# Altium PCB PCB1.PcbDoc
Units mm, origin at the board's own origin, x right, y up, seen from the top; angles counter-clockwise.
Board outline 49.3 x 38.92 mm, 2 copper layers (Top Layer, Bottom Layer); 26 components, 14 nets, 101 pads, 24 vias.
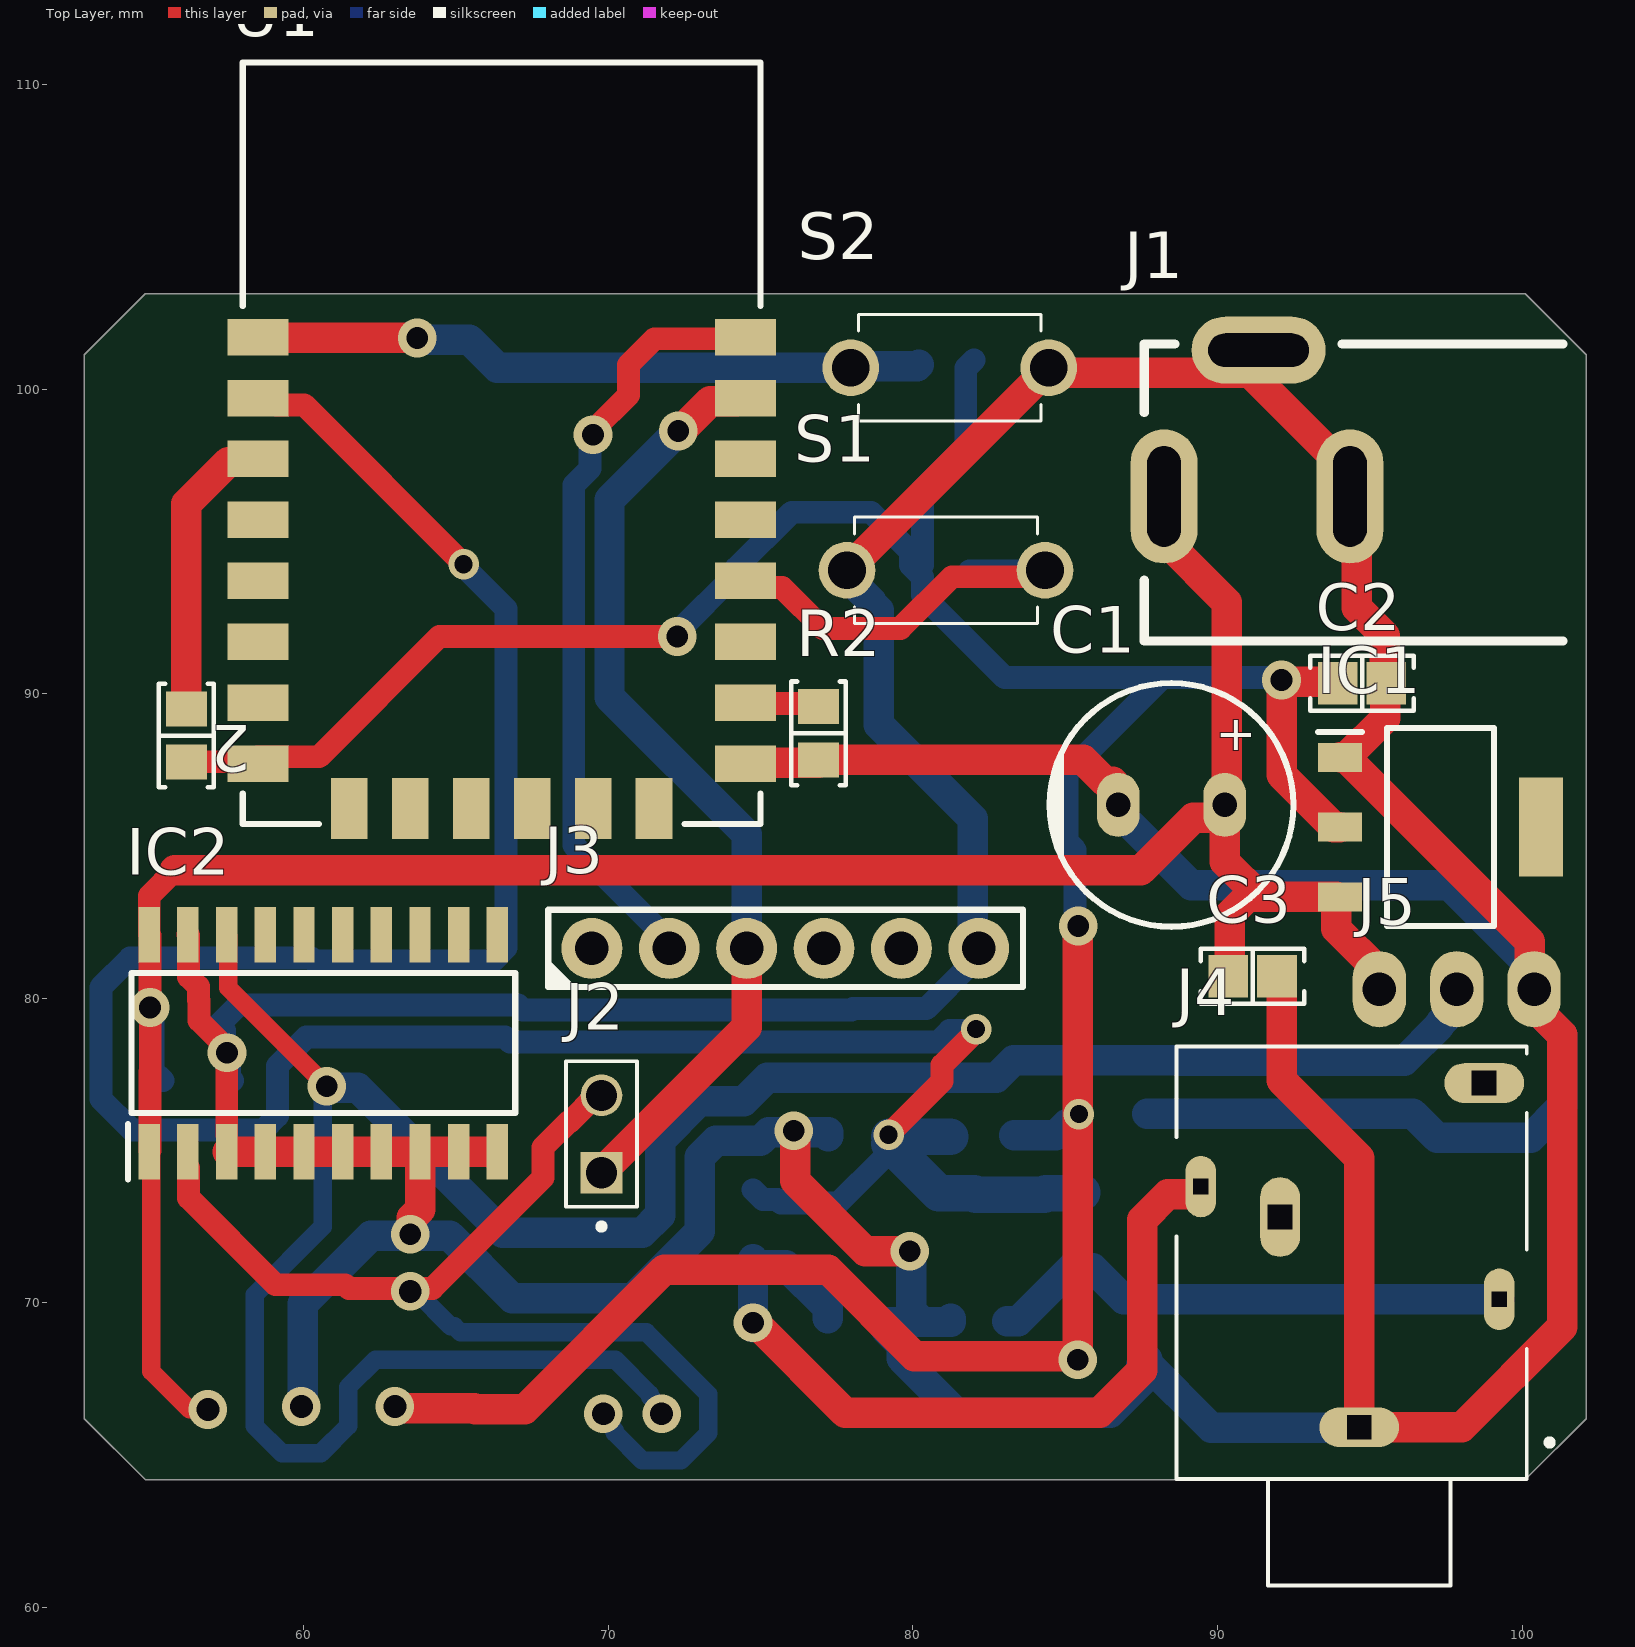
[diagram p0: Top Layer view]
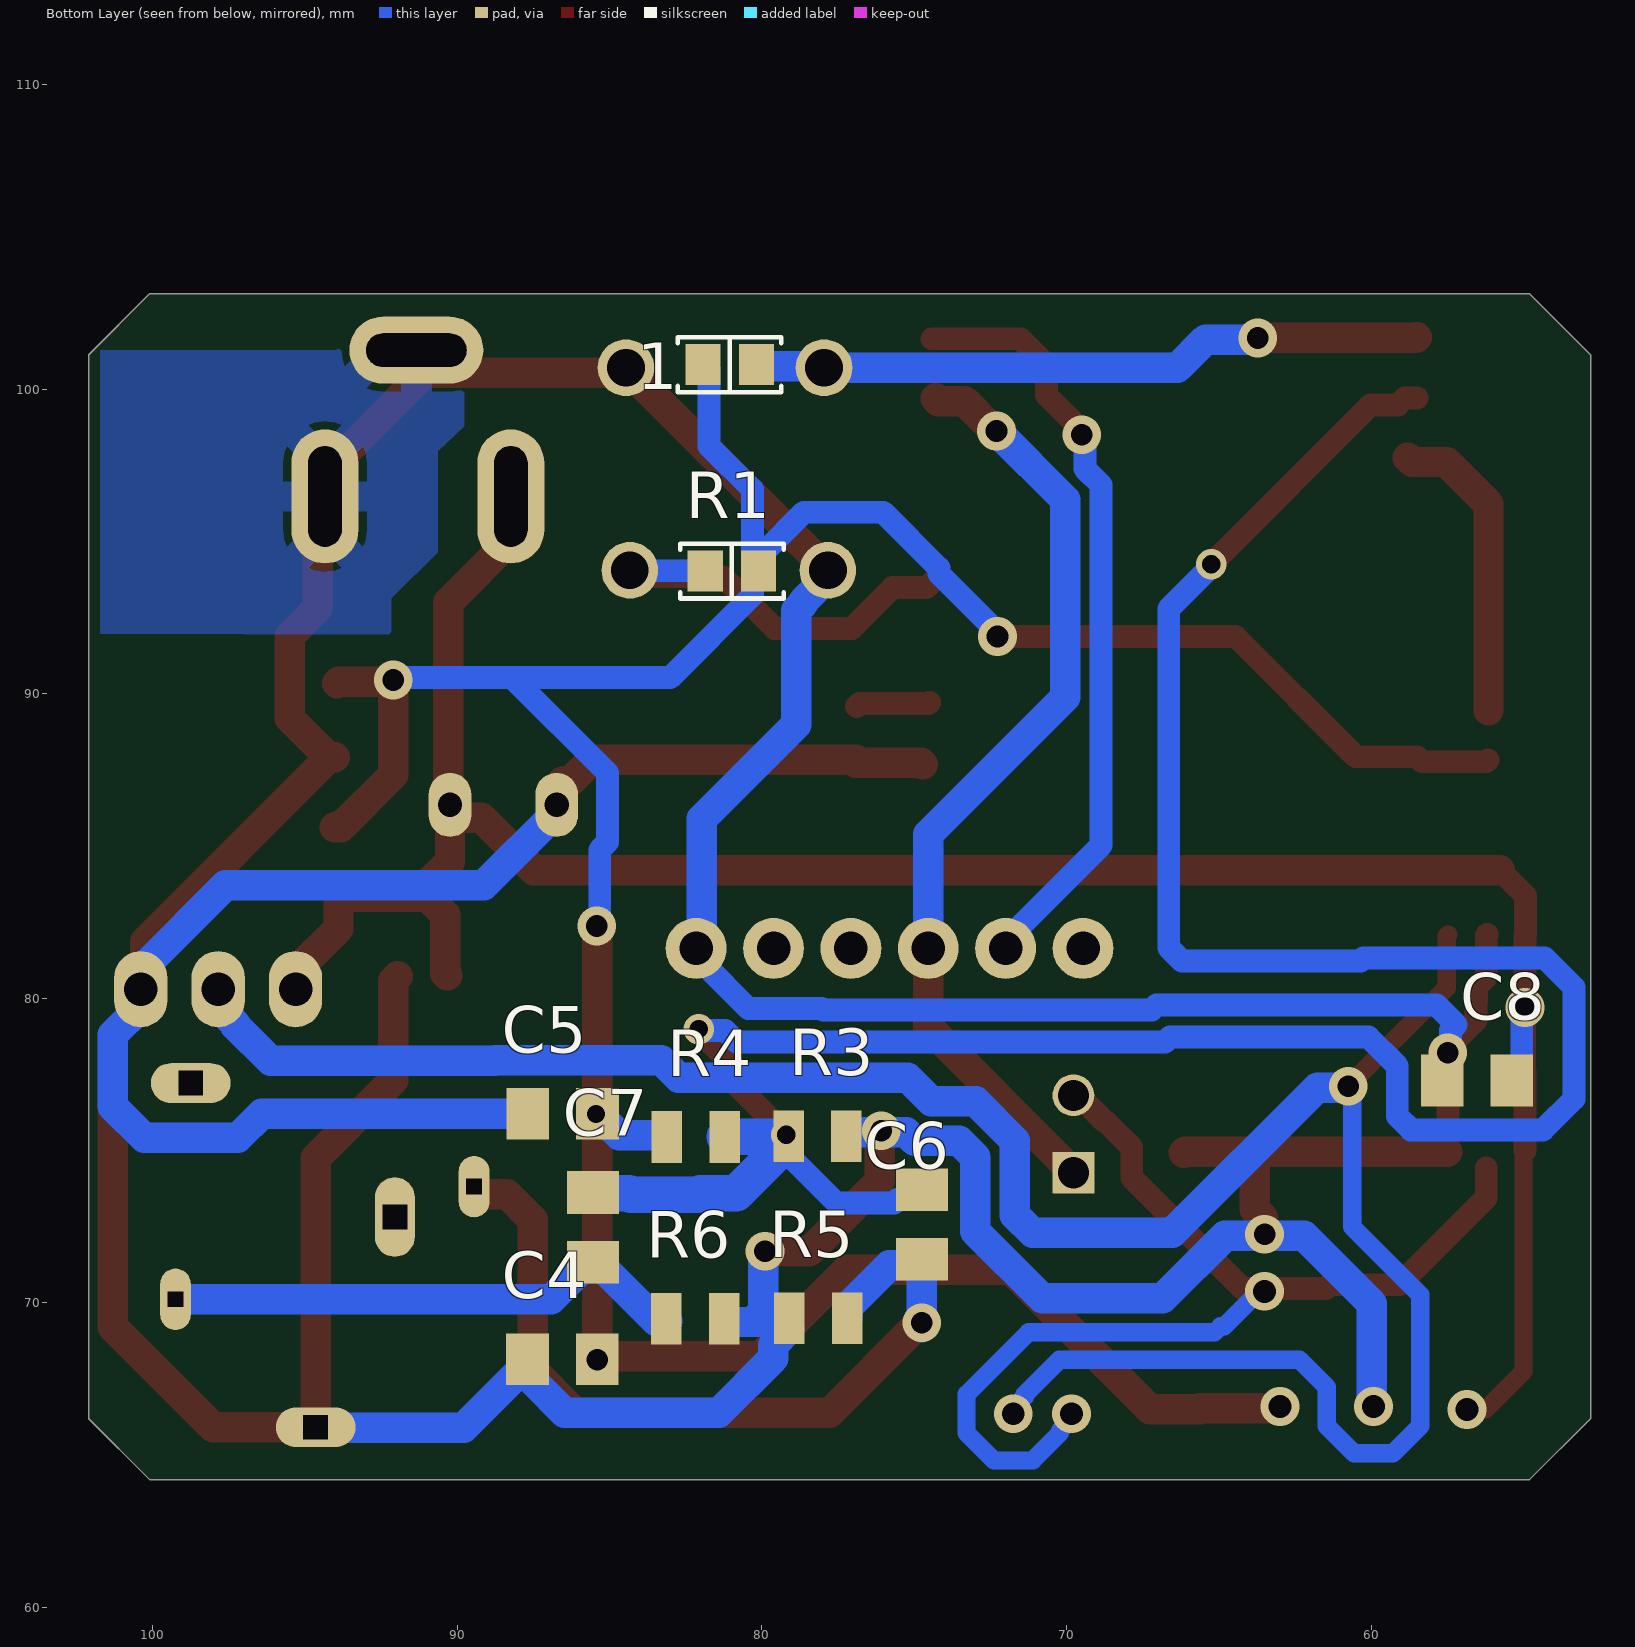
[diagram p1: Bottom Layer view, seen from below]

## Layer stack, top to bottom
Top Solder: solder mask 0.0102, Solder Resist, Dk 3.5
Top Layer: signal copper 0.0356
Dielectric 1: dielectric 0.32, FR-4, Dk 4.8
Bottom Layer: signal copper 0.0356
Bottom Solder: solder mask 0.0102, Solder Resist, Dk 3.5

## Board outline
52.8,66.2 52.8,101.125 54.8,103.125 100.1,103.125 102.1,101.125 102.1,66.2 100.1,64.2 54.8,64.2

## Design rules (kind name [scope] priority, off if disabled: settings)
Clearance [All] p1: gap=0.6 ignorepadtopadclearanceinfootprint=TRUE except(0.3: Arc-Arc Arc-Track Track-Track; 0.4: Arc-SMDPad Track-SMDPad)
HoleSize [All] p1: absolutevalues=TRUE maxlimit=8 minlimit=0.6 maxpercent=80.000 minpercent=20.000
MinimumAnnularRing [All] p1: minimumring=0.25
PolygonConnect [All] p1: connectstyle=Relief reliefconductorwidth=1 reliefentries=4 polygonreliefangle="90 Angle" conductorbypadedge=TRUE mindistance=0.381 enablemindistance=FALSE airgapwidth=0.254
RoutingTopology [All] p1: topology=Daisy_MidDriven
RoutingVias [All] p1: holewidth=0.8 width=1.27 viastyle="Through Hole" minholewidth=0.6 minwidth=1 maxholewidth=1 maxwidth=1.27
SolderMaskExpansion [All] p1: expansion=0.102 istentingtop=FALSE
Width [All] p1: maxlimit=2 minlimit=0.254 preferedwidth=0.4
28 further rules are at their usual default settings.

## Components (designator, comment, footprint, x,y, rotation, side; value= is the part's Value field where it differs from the comment)
1 "10 kOhms" "RES 0805_2012" 81.061,100.8 r180 bottom
2 "10 kOhms" "RES 0805_2012" 56.15,88.625 r90 top
C1 "1000µF" "CAP TH ALUM ELEC D8.00mm S3.50mm H17.50mm" 88.489,86.35 r0 top
C2 "22 µF" "CAP 0805_2012" 94.743,90.346 r180 top
C3 "22 µF" "CAP 0805_2012" 91.15,80.725 r180 top
C4 "100nf" CAP_0805 86.552,68.15 r0 bottom
C5 "220uF" CAP_0805 86.541,76.213 r0 bottom
C6 "100nf" CAP_0805 74.75,72.575 r90 bottom
C7 "100nf" CAP_0805 85.55,72.482 r90 bottom
C8 "100nf" CAP_0805 56.525,77.306 r180 bottom
IC1 "AMS1117-3.3" SOT229P700X180-4N 97.318,85.621 r0 top
IC2 "SN74HCT245NSRG4" SOIC127P780X200-20N 60.645,78.531 r90 top
J1 "DCJ0202" DCJ0202 94.345,96.475 r90 top
J2 "3-644456-2" TE_3-644456-2 69.775,74.275 r90 top
J3 "M20-7820642" "HARWIN M20-7820645" 75.81,81.637 r90 top
J4 "PJ324M" WENZHOU_PJ324M 94.65,71.319 r180 top
J5 "282834-3" "TE 282834-3" 97.85,80.3 r0 top
R1 "10k" "RES 0805_2012" 80.986,94.025 r180 bottom
R2 "10 kOhms" "RES 0805_2012" 76.9,88.7 r90 top
R3 "1M" RES_0805 78.175,75.475 r180 bottom
R4 "1M" RES_0805 82.175,75.45 r180 bottom
R5 "680" RES_0805 78.15,69.5 r0 bottom
R6 "680" RES_0805 82.185,69.485 r0 bottom
S1 "1825965-1" 18259651 84.336,94.05 r180 top
S2 "1825965-1" 18259651 84.461,100.7 r180 top
U1 "ESP-12F" ESP-12F 66.5,98.225 r0 top

## Footprints (in the part's own frame and the unit in brackets; to place one, negate y for a bottom-side part, rotate by r counter-clockwise, add the part's x,y. Pads: shape width x height; smd on the part's side, far side on the other; paste and mask are expansions set on the pad)
18259651 [mm]
  round 1.86 hole 1.24: 1(0,0) 2(6.5,0)
  silkscreen extent 0.25,-1.75 6.25,1.75, body extent -0.7,-1.75 7.2,1.75, height 4.92
"CAP 0805_2012" [mm] "Chip Capacitor, 2-Leads, Body 2.00x1.20mm, IPC Medium Density"
  rect 1.3x1.4 smd: 1(-0.8,0) 2(0.8,0)
  silkscreen extent -1.7,-0.9 1.7,0.9, body extent -1,-0.64 1,0.64, height 1.26
"CAP TH ALUM ELEC D8.00mm S3.50mm H17.50mm" [mm] "8mm Diameter 3.5mm Lead Spacing Aluminum Electrolytic Capacitors Radial, Can"
  oval 1.4x2.1 hole 0.8: 1(1.75,0) 2(-1.75,0)
  silkscreen extent -4,-4 4,4, body extent -4.01,-4 4,4, height 17.5
CAP_0805 [mm]
  rect 1.4x1.7 smd: 1(-1.143,0) 2(1.143,0)
  body extent -1.15,-0.76 1.15,0.79, height 1.01
DCJ0202 [mm]
  oval 4.4x2.2 hole 1.1 slot 3.3 at 0 deg: 1(0,6.1) 2(0,0)
  oval 2.2x4.4 hole 1.1 slot 3.3 at 90 deg: 3(4.8,3)
  silkscreen extent -4.75,-7 5,6.75, body extent -4.52,-7.48 4.84,6.52, height 11.01
ESP-12F [mm]
  rect 2x1.2 smd: 1(-8,3.48) 2(-8,1.48) 3(-8,-0.52) 4(-8,-2.52) 5(-8,-4.52) 6(-8,-6.52) 7(-8,-8.52) 8(-8,-10.52) 15(8,-10.52) 16(8,-8.52) 17(8,-6.52) 18(8,-4.52) 19(8,-2.52) 20(8,-0.52) 21(8,1.48) 22(8,3.48)
  rect 1.2x2 smd: 9(-5,-12) 10(-3,-12) 11(-1,-12) 12(1,-12) 13(3,-12) 14(5,-12)
  silkscreen extent -8.5,-12.5 8.5,12.5, body extent -8.76,-12.95 8.94,11.95, height 3.1
"HARWIN M20-7820645" [mm] "2.54mm DIL PC TAIL PIN HEADER ASSEMBLY"
  round 2 hole 1.1: 1(0,6.35) 2(0,3.81) 3(0,1.27) 4(0,-1.27) 5(0,-3.81) 6(0,-6.35)
  silkscreen extent -1.27,-7.8 1.27,7.81, body extent -1.25,-7.82 1.25,7.82, height 8.5
"RES 0805_2012" [mm] "Chip Resistor, 2-Leads, Body 2.00x1.25mm, IPC Medium Density"
  rect 1.15x1.35 smd: 1(-0.875,0) 2(0.875,0)
  silkscreen extent -1.7,-0.9 1.7,0.9, body extent -1,-0.62 1,0.63, height 0.6
RES_0805 [mm]
  rect 1x1.7 smd: 1(-0.95,0) 2(0.95,0)
  body extent -1,-0.63 1,0.63, height 0.47
SOIC127P780X200-20N [mm]
  rect 1.825x0.7 smd: 1(-3.562,5.715) 2(-3.562,4.445) 3(-3.562,3.175) 4(-3.562,1.905) 5(-3.562,0.635) 6(-3.562,-0.635) 7(-3.562,-1.905) 8(-3.562,-3.175) 9(-3.562,-4.445) 10(-3.562,-5.715) 11(3.562,-5.715) 12(3.562,-4.445) 13(3.562,-3.175) 14(3.562,-1.905) 15(3.562,-0.635) 16(3.562,0.635) 17(3.562,1.905) 18(3.562,3.175) 19(3.562,4.445) 20(3.562,5.715)
  silkscreen extent -4.48,-6.3 2.3,6.41, body extent -3.9,-6.3 3.9,6.3, height 2
SOT229P700X180-4N [mm]
  rect 1.45x0.95 smd: 1(-3.3,2.29) 2(-3.3,0) 3(-3.3,-2.29)
  rect 1.45x3.25 smd: 4(3.3,0)
  silkscreen extent -4.03,-3.25 1.75,3.25, body extent -3.35,-3.15 3.35,3.15, height 1.8
"TE 282834-3" [mm]
  oval 1.75x2.5 hole 1.1: 1(-2.54,0) 2(0,0) 3(2.54,0)
TE_3-644456-2 [mm]
  rect 1.37x1.37 hole 1.02: 1(0,0)
  round 1.37 hole 1.02: 2(2.54,0)
  silkscreen extent -1.87,-1.17 3.66,1.17, body extent -1.08,-1.16 3.7,1.18, height 10.03
WENZHOU_PJ324M [mm]
  oval 2.616x1.308 hole 0.8 square: 1(0,5.4) 4(-4.1,-5.9)
  oval 1.008x2.016 hole 0.5 square: 2(5.2,-2.5) 5(-4.6,1.2)
  oval 1.308x2.616 hole 0.8 square: 3(2.6,-1.5)
  silkscreen extent -6.35,-7.1 6,10.6, body extent -5.46,-7.09 6.04,10.61, height 6.3

## Part data
1 2 R2: library part 9-2176375-1, "RES 10K OHM 0.1% 1/5W 0805", Device Package="0805 (2012 Metric)", Manufacturer="TE Connectivity Passive Product", Operating Temperature="-55°C ~ 155°C", Power (Watts)="0.2W, 1/5W", Ratings=AEC-Q200, Supplier Device Package=0805, Supplier Part Number 1=1712-9-2176375-1CT-ND, Temperature Coefficient=±10ppm/°C, Tolerance=±0.1%, ComponentLink1Description=Datasheet, ComponentLink1URL=https://www.te.com/usa-en/product-9-2176375-1.datasheet.pdf, ComponentLink2Description="DigiKey Link", ComponentLink2URL=https://www.digikey.com/en/products/detail/te-connectivity-passive-product/9-2176375-1/18110542, Composition="Thin Film", Features="Anti-Sulfur, Automotive AEC-Q200, Moisture Resistant", Height - Seated (Max)="0.026\" (0.65mm)", LastUpdated="09/10/2023 7:52:15 pm", Lifecycle Status=Active, Minimum Order=1, Number of Terminations=2, Package / Case="0805 (2012 Metric)", Packaging=TapeAndReel, Part Number=9-2176375-1, Part Status=Active, PartId=76290, Price=0.39, Resistance="10 kOhms", Series=RQ73, Size / Dimension="0.079\" L x 0.049\" W (2.00mm x 1.25mm)", Supplier 1=DigiKey
C1: library part 6.3YXG1000MEFC8X16, "CAP ALUM 1000UF 20% 6.3V RADIAL", Device Package="Radial, Can", Lifetime @ Temp.="4000 Hrs @ 105°C", Manufacturer=Rubycon, Operating Temperature="-40°C ~ 105°C", Ripple Current @ High Frequency="840mA @ 100kHz", Ripple Current @ Low Frequency="504mA @ 120Hz", Supplier Part Number 1=1189-2348-ND, Tolerance=±20%, Voltage - Rated=6.3V, Applications="General Purpose", Capacitance=1000µF, ComponentLink1Description=Datasheet, ComponentLink1URL=http://www.rubycon.co.jp/en/catalog/e_pdfs/aluminum/e_yxg.pdf, ComponentLink2Description="DigiKey Link", ComponentLink2URL=http://digikey.com/product-detail/en/rubycon/6.3YXG1000MEFC8X16/1189-2348-ND/3563403, Height - Seated (Max)="0.689\" (17.50mm)", Impedance="87 mOhms", LastUpdated="08/09/2020 2:47:34 am", Lead Spacing="0.138\" (3.50mm)", Lifecycle Status=Active, Minimum Order=1, Mounting Type="Through Hole", Package / Case="Radial, Can", Packaging=Bulk, Part Number=6.3YXG1000MEFC8X16, Part Status=Active, PartId=24587, Polarization=Polar, Price=0.51, Series=YXG, Size / Dimension="0.315\" Dia (8.00mm)", Supplier 1=DigiKey
C2 C3: library part 0805X226M6R3CT, "CAP CER 22UF 6.3V X5R 0805", Device Package="0805 (2012 Metric)", Manufacturer="Walsin Technology Corporation", Operating Temperature="-55°C ~ 85°C", Supplier Part Number 1=1292-0805X226M6R3CT-ND, Temperature Coefficient=X5R, Tolerance=±20%, Voltage - Rated=6.3V, Applications="General Purpose", Capacitance="22 µF", ComponentLink1Description=Datasheet, ComponentLink1URL=https://www.passivecomponent.com/wp-content/uploads/datasheet/WTC_MLCC_General_Purpose.pdf, ComponentLink2Description="DigiKey Link", ComponentLink2URL=https://www.digikey.com/en/products/detail/walsin-technology-corporation/0805X226M6R3CT/6707560, LastUpdated="09/10/2023 7:11:48 pm", Lifecycle Status=Active, Minimum Order=1, Mounting Type="Surface Mount, MLCC", Package / Case="0805 (2012 Metric)", Packaging=TapeAndReel, Part Number=0805X226M6R3CT, Part Status=Active, PartId=39842, Price=0.02, Series=-, Size / Dimension="0.079\" L x 0.049\" W (2.00mm x 1.25mm)", Supplier 1=DigiKey, Thickness (Max)="0.057\" (1.45mm)"
C4 C5 C6 C7 C8: library part CAP_0805_6V3, "Capacitor SMD 0805 6V3"
IC1: "Integrated Circuit", Manufacturer_Name=Advanced, Datasheet Link=https://datasheet.datasheetarchive.com/originals/distributors/Datasheets-28/DSA-550594.pdf, Height=1.8mm, Manufacturer_Part_Number=AMS1117-3.3
IC2: "Integrated Circuit", Manufacturer_Name="Texas Instruments", Mouser Part Number=595-SN74HCT245NSRG4, Datasheet Link=https://www.ti.com/lit/ds/symlink/sn74hct245.pdf?HQS=dis-mous-null-mousermode-dsf-pf-null-wwe&ts=1618816642034&ref_url=https%253A%252F%252Feu.mouser.com%252F, Height=2mm, Manufacturer_Part_Number=SN74HCT245NSRG4, Mouser Price/Stock=https://www.mouser.com/Search/Refine.aspx?Keyword=595-SN74HCT245NSRG4
J1: "DC Barrell Jack 2.1mm 24V 5A THT", Manufacturer=CONEC, Manufacturer Part Number=DCJ0202
J2: Package=None, Availability=Unavailable, MF="{'manufacturer': u'TE Connectivity'}", MP=3-644456-2, Price=None
J3: "CONN RCPT 6POS 0.1 GOLD PCB", Current Rating (Amps)=3A, Insulation Color=Black, Manufacturer="Harwin Inc.", Material Flammability Rating="UL94 V-0", Operating Temperature="-40°C ~ 105°C", Supplier Part Number 1=952-1808-ND, ComponentLink1Description=Datasheet, ComponentLink1URL=https://cdn.harwin.com/pdfs/C001XX_M20_Series_Connectors.pdf, ComponentLink2Description="DigiKey Link", ComponentLink2URL=https://www.digikey.com/en/products/detail/harwin-inc/M20-7820642/3727776, Connector Type=Receptacle, Contact Finish - Mating=Gold, Contact Finish - Post=Tin, Contact Finish Thickness - Mating=Flash, Contact Length - Post="0.118\" (3.00mm)", Contact Type="Female Socket", Fastening Type=Push-Pull, Insulation Height="0.335\" (8.51mm)", LastUpdated="21/09/2022 6:58:09 pm", Lifecycle Status=Active, Mated Stacking Heights="11.04mm, 12.63mm", Minimum Order=1, Mounting Type="Through Hole", Number of Positions=6, Number of Positions Loaded=All, Number of Rows=1, Packaging=Tube, Part Number=M20-7820642, Part Status=Active, Pitch - Mating="0.100\" (2.54mm)", Price=0.55, Series=M20, Style="Board to Board or Cable", Supplier 1=DigiKey, Termination=Solder
J4: "Headphone Stereo jack/Audio connector", Package=Package, Availability="Not in stock", Check_prices=https://www.snapeda.com/parts/PJ324M/Wenzhou%20QingPu%20Electronics%20Co.Ltd/view-part/3664803/?ref=eda, MF="Wenzhou QingPu Electronics Co.Ltd", MP=PJ324M, Price=None, SnapEDA_Link=https://www.snapeda.com/parts/PJ324M/Wenzhou%20QingPu%20Electronics%20Co.Ltd/view-part/3664803/?ref=snap
J5: "TERM BLK 3P SIDE ENT 2.54MM PCB", Color=Green, Current=10A, Manufacturer="TE Connectivity AMP Connectors", Supplier Part Number 1=A98334-ND, Voltage=150V, ComponentLink1Description=Datasheet, ComponentLink1URL=https://www.te.com/commerce/DocumentDelivery/DDEController?Action=srchrtrv&DocNm=282834&DocType=Customer+Drawing&DocLang=English, ComponentLink2Description="DigiKey Link", ComponentLink2URL=http://digikey.com/product-detail/en/te-connectivity-amp-connectors/282834-3/A98334-ND/1153264, LastUpdated="15/01/2020 4:15:50 am", Lifecycle Status=Active, Mating Orientation="Horizontal with Board", Minimum Order=1, Mounting Type="Through Hole", Number of Levels=1, Packaging=Bulk, Part Number=282834-3, Part Status=Active, Pitch="0.100\" (2.54mm)", Positions Per Level=3, Price=2.01, Series=Buchanan, Supplier 1=DigiKey, Wire Gauge="16-30 AWG", Wire Termination="Screw - Rising Cage Clamp"
R1: library part 9-2176375-1, "RES 10K OHM 0.1% 1/5W 0805", Device Package="0805 (2012 Metric)", Manufacturer="TE Connectivity Passive Product", Operating Temperature="-55°C ~ 155°C", Power (Watts)="0.2W, 1/5W", Ratings=AEC-Q200, Resistance="10 kOhms", Supplier Device Package=0805, Supplier Part Number 1=1712-9-2176375-1CT-ND, Temperature Coefficient=±10ppm/°C, Tolerance=±0.1%, ComponentLink1Description=Datasheet, ComponentLink1URL=https://www.te.com/usa-en/product-9-2176375-1.datasheet.pdf, ComponentLink2Description="DigiKey Link", ComponentLink2URL=https://www.digikey.com/en/products/detail/te-connectivity-passive-product/9-2176375-1/18110542, Composition="Thin Film", Features="Anti-Sulfur, Automotive AEC-Q200, Moisture Resistant", Height - Seated (Max)="0.026\" (0.65mm)", LastUpdated="09/10/2023 7:52:15 pm", Lifecycle Status=Active, Minimum Order=1, Number of Terminations=2, Package / Case="0805 (2012 Metric)", Packaging=TapeAndReel, Part Number=9-2176375-1, Part Status=Active, PartId=76290, Price=0.39, Series=RQ73, Size / Dimension="0.079\" L x 0.049\" W (2.00mm x 1.25mm)", Supplier 1=DigiKey
R3 R4 R5 R6: library part RES_0805, "Resistor SMD 0805"
S1 S2: "Switch", Manufacturer_Name="TE Connectivity", Arrow Part Number=1825965-1, Arrow Price/Stock=https://www.arrow.com/en/products/1825965-1/te-connectivity?region=nac, Datasheet Link=https://www.arrow.com/en/products/1825965-1/te-connectivity, Height=5mm, Manufacturer_Part_Number=1825965-1
U1: "WiFi Module", Package=Package, Availability="No availability data", Check_prices=https://www.snapeda.com/parts/ESP-12F/AI-Thinker/view-part/6648243/?ref=eda, MF=AI-Thinker, MP=ESP-12F, Price=None, SnapEDA_Link=https://www.snapeda.com/parts/ESP-12F/AI-Thinker/view-part/6648243/?ref=snap

## Via types
v1: diameter 1.27, hole 0.711, Top Layer to Bottom Layer, 14 vias
v2: diameter 1.27, hole 0.75, Top Layer to Bottom Layer, 6 vias
v3: diameter 1, hole 0.6, Top Layer to Bottom Layer, 4 vias

## Nets (pads, with @x,y where several pads share a name; then routed paths per layer and width w, separated by ;. In a path a pad name is that pad's centre, name@x,y a point inside that pad or via, vN(x,y) a via of type N, cw(c..) or ccw(c..) an arc to the next point about the centre after c; other vN are vias at no path point)
+3V3: 1.1 2.1 C2.2 C4.1 C5.1 IC1.2 R1.2 R4.1 U1.8 | length 109.9
  Top Layer w0.75: 2.1@56.169,87.825 56.229,87.765 U1.8@58.335,87.765 ; U1.8@58.5,87.93 60.509,87.93 64.454,91.875 v1(72.265,91.875)
  Top Layer w1: v2(62.995,66.6) 63.047,66.548 65.597,66.548 65.63,66.515 67.262,66.515 71.832,71.085 77.216,71.085 80.051,68.25 85.409,68.25 v1@85.409,82.375 ; C2.2 93.891,90.398 92.152,90.398 v1(92.1,90.45) 92.1,87.339 93.819,85.621 IC1.2
  Bottom Layer w0.75: v1(72.265,91.875) 72.265,92.016 74.193,93.943 74.193,94.127 76.021,95.955 78.625,95.955 79.911,94.669 79.911,94.225 R1.2 ; 1.1@82,100.95 81.736,100.686 81.736,98.125 80.311,96.7 80.311,94.225 R1.2 ; v1(85.425,82.375) 85.326,82.475 85.326,84.874 85.064,85.135 85.064,87.394 88.195,90.525 89.5,90.525 ; v1(92.1,90.45) 92.023,90.527 83.013,90.527 80.311,93.229 80.311,93.825 R1.2
  Bottom Layer w1: R4.1@83.325,75.5 84.685,75.5 C5.1@85.048,75.863
  other v1: 85.409,68.135
  other v3: 85.45,76.2
+5: C1.1 C3.2 C8.2 IC1.3 IC2.1 IC2.20 J1.1 J5.1 | length 80.4
  Top Layer w0.6: IC2.1@55,74.75 55,67.75 56.25,66.5 v2(56.855,66.5)
  Top Layer w0.75: v1(54.954,79.698) 54.966,79.686 54.966,77.591 54.955,77.58 IC2.1@54.955,74.994 ; v1@55.065,79.715 55.065,79.856 54.955,79.966 54.955,82.068 IC2.20 54.93,83.358 55.772,84.2
  Top Layer w1: 55.772,84.2 87.485,84.2 89.208,85.923 90.054,85.923 C1.1@90.239,86.108 ; J1.1 88.245,95.05 90.3,92.995 90.3,86.625 C1.1@90.2,86.525 ; C3.2@90.325,80.75 90.4,80.825 90.4,82.745 90.986,83.331 91.394,83.331 ; C1.1@90.35,86.25 90.35,86.219 C1.1@90.239,86.108 ; IC1.3@93.9,83.275 93.9,82.288 95.31,80.878 J5.1 ; IC1.3@93.9,83.331 91.394,83.331 ; C1.1@90.239,86.108 90.239,84.486 91.394,83.331
  Bottom Layer w0.75: v1(54.954,79.698) 54.954,79.557 55.057,79.454 55.057,77.631 C8.2
AUX_IN: C6.2 C7.2 R3.1 R4.2 U1.2 | length 90.1
  Top Layer w0.75: U1.2 58.9,99.705 59.125,99.48 60.02,99.48 v3(65.25,94.25) ; v3(79.2,75.525) 80.955,77.28 80.955,77.806 82.072,78.923 v3(82.072,78.991)
  Bottom Layer w0.75: v3(65.25,94.25) 65.25,94.182 66.645,92.787 66.645,81.659 66.206,81.22 60.354,81.22 60.249,81.325 54.304,81.325 53.344,80.365 53.344,76.698 54.361,75.681 58.689,75.681 59.143,76.135 59.143,77.782 60.086,78.725 66.609,78.725 66.769,78.566 80.827,78.566 81.204,78.943 82.024,78.943 v3(82.072,78.991) ; C6.2 75.075,73.393 75.55,73.393 75.664,73.278 77.55,73.278 R3.1@79,74.728
  Bottom Layer w1.2: R3.1@79.225,75.225 80.85,73.6 82.019,73.6 82.069,73.55 84.306,73.55 84.356,73.6 85.525,73.6 C7.2 ; R3.1@79.225,75.462 81.212,75.462 R4.2
AUX_RING: C7.1 J4.5 R6.2 | length 17.3
  Bottom Layer w1: R6.2@83.1,69.4 83.461,69.4 C7.1@85.281,71.22 ; C7.1@85.3,71.2 85.361,71.139 85.9,71.139 86.92,70.119 J4.5
AUX_TIP: C6.1 J4.2 R5.1 | length 27.5
  Top Layer w1: v1@74.75,69.277 74.771,69.298 74.875,69.298 77.773,66.4 86.127,66.4 87.525,67.798 87.525,72.725 88.366,73.566 89.446,73.566 89.45,73.569 J4.2
  Bottom Layer w1: v1@74.75,69.2 v1(74.75,69.35) C6.1 ; C6.1@74.9,71.25 74.918,71.232 75.818,71.232 77.2,69.85 R5.1
GND: C1.2 C2.1 C3.1 C4.2 C5.2 C8.1 IC1.1 IC2.3 IC2.4 IC2.5 IC2.6 IC2.7 IC2.8 IC2.9 IC2.10 IC2.19 J1.2 J1.3 J3.6 J4.1 J5.3 R2.1 R3.2 R5.2 R6.1 S1.2 S2.1 U1.15 | length 241.8
  Top Layer w0.75: IC2.19 56.225,82.068 56.225,80.704 56.545,80.384 56.545,79.944 56.564,79.925 56.564,79.274 57.483,78.355 v1(57.483,78.215) ; IC2.3@57.476,75.506 57.476,78.191 v1@57.5,78.215
  Top Layer w1: IC2.3@57.501,74.969 IC2.4 IC2.5 IC2.6 IC2.7 IC2.8 ; v2(59.925,66.6) 60,66.525 v2@60,66.5 ; v1(63.5,72.25) 63.552,72.302 63.552,72.8 63.82,73.068 IC2.8 ; IC2.10@66.15,74.925 66.106,74.969 IC2.9 IC2.8 ; U1.15@74.725,87.675 74.777,87.727 R2.1@76.9,87.727 ; v1(76.084,75.656) 76.135,75.604 76.135,74.004 78.439,71.7 v1(79.9,71.7) ; R2.1 85.589,87.825 86.313,87.102 86.554,87.102 86.739,86.917 C1.2@86.739,86.675 ; S1.2@77.825,93.825 77.825,94.052 84.461,100.687 S2.1 84.625,100.535 91.06,100.535 94.225,97.37 J1.2@94.225,95.875 ; J3.6@81.825,81.425 J3.6@81.969,81.569 ; C3.1 92.1,80.575 92.1,77.309 94.65,74.759 J4.1 98.017,65.919 101.308,69.211 101.308,78.804 100.39,79.722 J5.3 100.246,80.444 100.246,81.866 IC1.1@94.201,87.911 ; IC1.1 IC1.1@94.201,87.911 ; J1.2@94.575,95.875 94.575,92.821 95.493,91.902 C2.1@95.493,90.55 ; C2.1@95.5,90.55 95.5,89.192 94.219,87.911 IC1.1@94.201,87.911
  Bottom Layer w0.75: v1(57.483,78.215) 57.401,78.297 57.401,78.938 57.208,79.131 57.853,79.775 67.044,79.775 67.204,79.616 77.988,79.616 78.035,79.662 80.438,79.662 81.925,81.149 J3.6@81.925,81.725 ; v1@57.509,78.241 57.575,78.175 57.575,77.398 C8.1
  Bottom Layer w1: v2(59.925,66.6) 59.977,66.652 59.977,69.977 62.198,72.198 63.448,72.198 v1(63.5,72.25) 63.552,72.198 64.802,72.198 66.85,70.15 70.803,70.15 73,72.347 73,74.791 73.527,75.318 74.981,75.318 75.268,75.604 76.032,75.604 v1(76.084,75.656) ; v1@76.084,75.604 77.225,75.604 R3.2 ; S1.2 77.836,93.834 78.636,93.034 78.636,92.977 78.875,92.738 78.875,88.985 81.969,85.892 J3.6@81.969,81.829 ; R5.2@79.1,69.15 79.635,68.615 79.635,68.179 81.414,66.4 86.481,66.4 87.495,67.413 87.495,67.95 C4.2@87.62,68.075 ; R5.2@79.2,69.375 80.3,69.375 ; v1(79.9,71.7) 79.952,71.648 79.952,69.723 80.3,69.375 ; R6.1 81.235,69.375 80.3,69.375 ; C1.2 86.739,86.108 89.139,83.708 97.61,83.708 J5.3@100.246,81.072 ; C5.2 96.414,76.213 97.206,75.421 100.281,75.421 101.308,76.448 101.308,78.804 100.4,79.712 J5.3@100.4,80.45 ; C4.2 C4.2@87.62,68.075 ; J4.1@94.775,65.919 J4.1 94.631,65.9 89.795,65.9 C4.2@87.62,68.075
IO0: R1.1 S1.1 U1.18 | length 13.9
  Top Layer w0.75: U1.18@74.325,93.75 74.595,93.48 75.712,93.48 77.047,92.145 79.589,92.145 81.281,93.838 84.123,93.838 S1.1
  Bottom Layer w0.75: R1.1 81.873,94.038 84.212,94.038 84.268,93.982 S1.1@84.275,93.975
Net2_2: 2.2 U1.3 | length 10.1
  Top Layer w1: 2.2@56.15,89.45 56.15,96.228 57.527,97.605 58.655,97.605 U1.3@58.8,97.75
NetR2_2: R2.2 U1.16 | length 2.5
  Top Layer w0.75: U1.16 74.53,89.675 76.8,89.675 R2.2
nRST: 1.2 S2.2 U1.1 | length 22.3
  Top Layer w1: U1.1 58.515,101.69 63.71,101.69 v1(63.725,101.675)
  Bottom Layer w1: v1(63.725,101.675) 63.777,101.623 65.437,101.623 66.36,100.7 S2.2 ; S2.2@77.77,100.75 80.136,100.75 1.2
RXD0: J2.1 J3.3 U1.21 | length 31.6
  Top Layer w1: J2.1 69.96,74.46 69.96,74.476 74.54,79.056 J3.3 ; v1(72.3,98.625) 72.373,98.625 73.353,99.605 74.205,99.605 U1.21@74.3,99.7
  Bottom Layer w1: v1(72.3,98.625) 70.04,96.365 70.04,89.885 74.54,85.385 J3.3
STRIP_OUT: IC2.2 J2.2 | length 36.1
  Top Layer w0.75: IC2.2@56.225,74.431 56.225,74.176 56.225,73.45 59.076,70.599 61.365,70.599 61.485,70.479 63.401,70.479 v2(63.5,70.38) ; v2@63.5,70.5 63.521,70.479 64.229,70.479 67.859,74.109 67.859,75.107 68.686,75.935 68.727,75.935 69.607,76.815 J2.2
  Bottom Layer w0.6: v2(63.5,70.38) 63.681,70.38 64.828,69.233 64.948,69.233 65.146,69.035 71.251,69.035 73.285,67.001 73.285,65.729 72.386,64.83 71.114,64.83 70.215,65.729 70.215,65.806 69.837,66.184 v2(69.837,66.365)
STRIP_OUT_SHIFTED: IC2.18 J5.2 | length 79.3
  Top Layer w0.6: IC2.18 57.52,82.043 57.52,80.348 v1(60.753,77.115)
  Bottom Layer w0.6: v1@60.625,77.125 60.625,72.502 58.39,70.267 58.39,65.964 59.289,65.065 60.561,65.065 61.46,65.964 61.46,67.236 62.359,68.135 70.238,68.135 71.372,67.001 71.372,66.924 71.75,66.546 v2(71.75,66.365)
  Bottom Layer w1: v1(60.753,77.115) 60.805,77.063 61.775,77.063 66.538,72.3 71.114,72.3 71.7,72.886 71.7,75.329 72.989,76.618 74.443,76.618 75.216,77.391 82.735,77.391 83.307,77.963 88.757,77.963 88.77,77.95 96.128,77.95 97.285,79.107 97.285,79.157 97.85,79.722 J5.2
TXD0: J3.2 U1.22 | length 25.3
  Top Layer w0.75: v1(69.5,98.5) 69.5,98.641 70.66,99.801 70.66,100.794 71.516,101.65 U1.22@74.425,101.65
  Bottom Layer w0.75: v1(69.5,98.5) 69.401,98.401 69.401,97.387 68.865,96.852 68.865,85.025 72,81.89 J3.2
pads on no net: IC1.4 IC2.11 IC2.12 IC2.13 IC2.14 IC2.15 IC2.16 IC2.17 J3.1 J3.4 J3.5 J4.3 J4.4 U1.4 U1.5 U1.6 U1.7 U1.9 U1.10 U1.11 U1.12 U1.13 U1.14 U1.17 U1.19 U1.20

## Polygon pours and split planes (outlines as drawn)
GND on Bottom Layer "GND_L02_P000" (solid, remove dead copper, pour order 0): 101.725,91.961 101.725,101.275 93.975,101.275 93.625,101.625 89.775,101.625 89.775,99.275 89.775,98.775 90.65,97.95 90.65,94.65 92.175,93.125 92.175,91.938

## Silkscreen, mask and mechanical layers (free items; w line width, h text height)
Mechanical 1:
  the board outline again, w0.254

## Text inside footprints (layer, text, board x,y; h text height)
C1: Top Overlay "+" at 89.939,87.75 h2